# EAGLE board Projeto IntroECA sensor de umidade do solo (EAGLE 9.7.0)

Size 137.31 x 83.98 mm. Coordinates in mm from the lower left corner, seen from the top.
Outline: 0,0 137.31,0 137.31,83.98 0,83.98 0,0
Copper layers (1*16): Top 0.035mm / dielectric 1.5mm / Bottom 0.035mm
Design rules "default": minimum track width 6mil, minimum drill 0.35mm, track to track 6mil, track to pad 6mil, pad to pad 6mil, via to via 6mil, smd to smd 6mil, copper to edge 40mil, drill to drill 6mil, minimum pad ring 10mil, minimum via ring 8mil, stop-mask expansion 4mil, vias tented up to drill 0mil, thermal gap 10mil

## Footprints (pad centres in the part's own frame; a part is rotated, then mirrored left to right if it is on the bottom)
LEDRD254W60D565H860B = drill 0.981 pad 1.581: 1 -1.27,0; 2 1.27,0
LEDRD254W60D565H860B_Y = drill 0.981 pad 1.581: 1 -1.27,0; 2 1.27,0
LEDRD254W60D565H860B_G = drill 0.981 pad 1.581: 1 -1.27,0; 2 1.27,0
RESAD1016W63L850D250B = drill 0.83 pad 1.43: 1 -5.08,0; 2 5.08,0
SEN-13322 = drill 1.016 long: 1 -2.54,0; 2 0,0; 3 2.54,0
ARDUINO-UNO-R3-SHIELD = drill 1.016 pad 1.88: 3.3V 24.13,-2.54; 5V 24.13,0; A0 24.13,12.7; A1 24.13,15.24; A2 24.13,17.78; A3 24.13,20.32; A4 24.13,22.86; A5 24.13,25.4; AREF -24.13,-13.97; D2 -24.13,20.32; D3 -24.13,17.78; D4 -24.13,15.24; D5 -24.13,12.7; D6 -24.13,10.16; D7 -24.13,7.62; D8 -24.13,3.81; D9 -24.13,1.27; D10 -24.13,-1.27; D11 -24.13,-3.81; D12 -24.13,-6.35; D13 -24.13,-8.89; GND@0 24.13,2.54; GND@1 24.13,5.08; GND@2 -24.13,-11.43; IOREF 24.13,-7.62; NC 24.13,-10.16; RES 24.13,-5.08; RX -24.13,25.4; SCL -24.13,-19.05; SDA -24.13,-16.51; TX -24.13,22.86; VIN 24.13,7.62

## Placement (x,y rotation side)
D6  RED  [LEDRD254W60D565H860B]  104.31,39.06 0 top
D7  YELLOW  [LEDRD254W60D565H860B_Y]  117.01,39.06 0 top
D8  GREEN  [LEDRD254W60D565H860B_G]  129.71,39.06 0 top
R2  1k  [RESAD1016W63L850D250B]  105.58,51.76 90 top
R3  1k  [RESAD1016W63L850D250B]  118.28,51.76 90 top
R4  1k  [RESAD1016W63L850D250B]  130.98,51.76 90 top
SEN2  SEN-13322  [SEN-13322]  70.03,7.62 0 top
U2  ARDUINO-UNO-R3-SHIELD  [ARDUINO-UNO-R3-SHIELD]  47.88,54.13 270 top

## Library data of the parts
D6 = Tinkercad; CATEGORY: Opto-Electronic; SUB-CATEGORY: LED; VALUE: LED_RED
D7 = Tinkercad; CATEGORY: Opto-Electronic; SUB-CATEGORY: LED; VALUE: LED_YELLOW
D8 = Tinkercad; CATEGORY: Opto-Electronic; SUB-CATEGORY: LED; VALUE: LED_GREEN
R2-R4 SEN2 U2 = Tinkercad

## Nets
D6_C: D6.2 R2.1
D7_C: D7.2 R3.1
D8_C: D8.2 R4.1
U2_5V: SEN2.1 U2.5V
U2_A5: SEN2.3 U2.A5
U2_D2: D6.1 U2.D2
U2_D3: D7.1 U2.D3
U2_D4: D8.1 U2.D4
U2_GND: R2.2 R3.2 R4.2 SEN2.2 U2.GND@0 U2.GND@1 U2.GND@2

## Tracks (layer width: path | path; a pad name or v marks a point on that pad's centre or on a via)
D6_C  (1 unrouted)
D7_C  (1 unrouted)
D8_C  (1 unrouted)
U2_5V  (1 unrouted)
U2_A5  (1 unrouted)
U2_D2  (1 unrouted)
U2_D3  (1 unrouted)
U2_D4  (1 unrouted)
U2_GND  (6 unrouted)